# EAGLE board SmartGlove_Schematic (EAGLE 9.2.0)
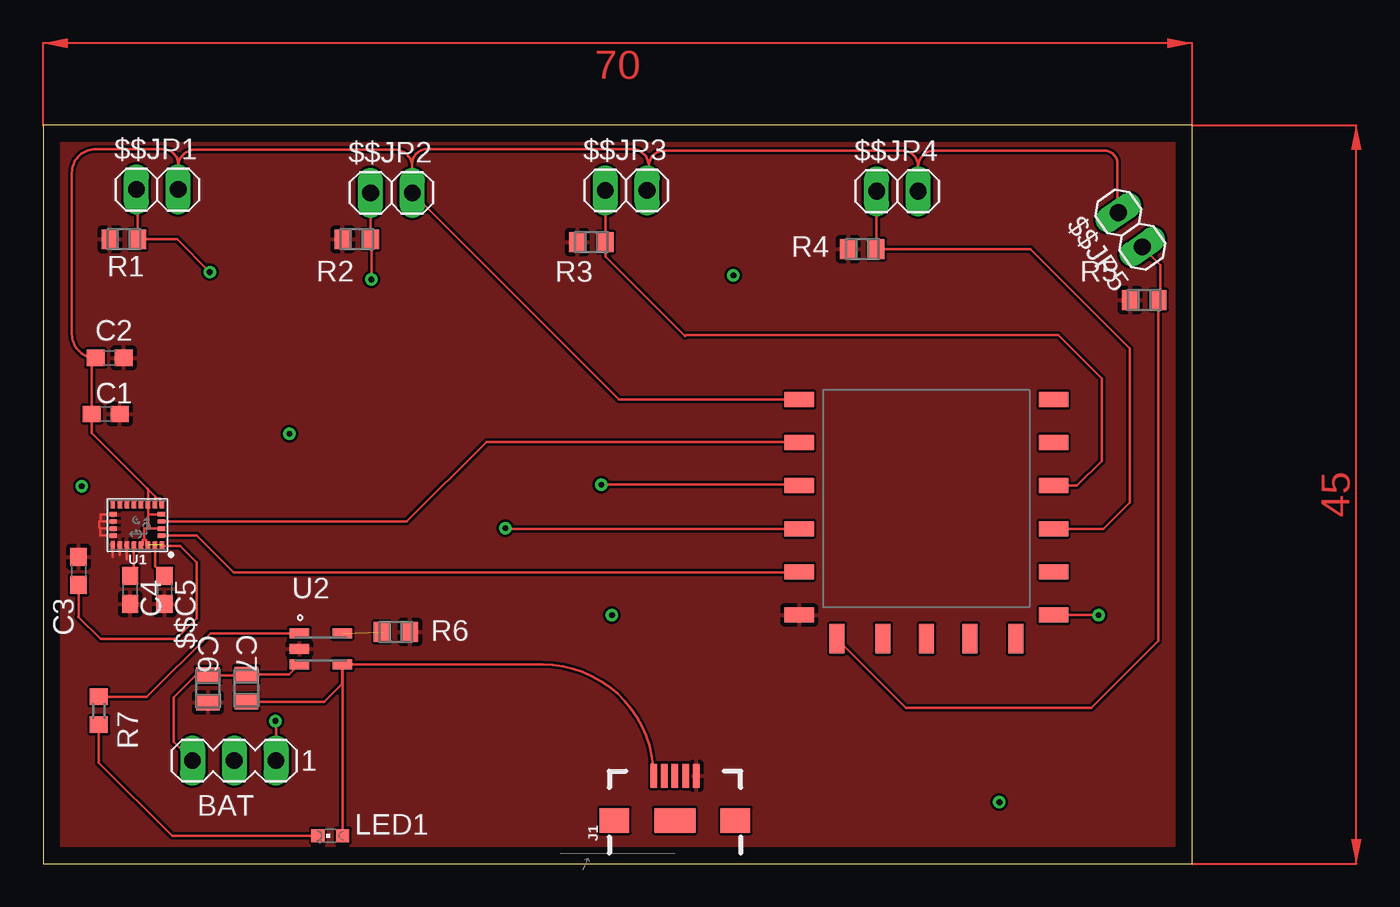
[diagram p0: board, top side]
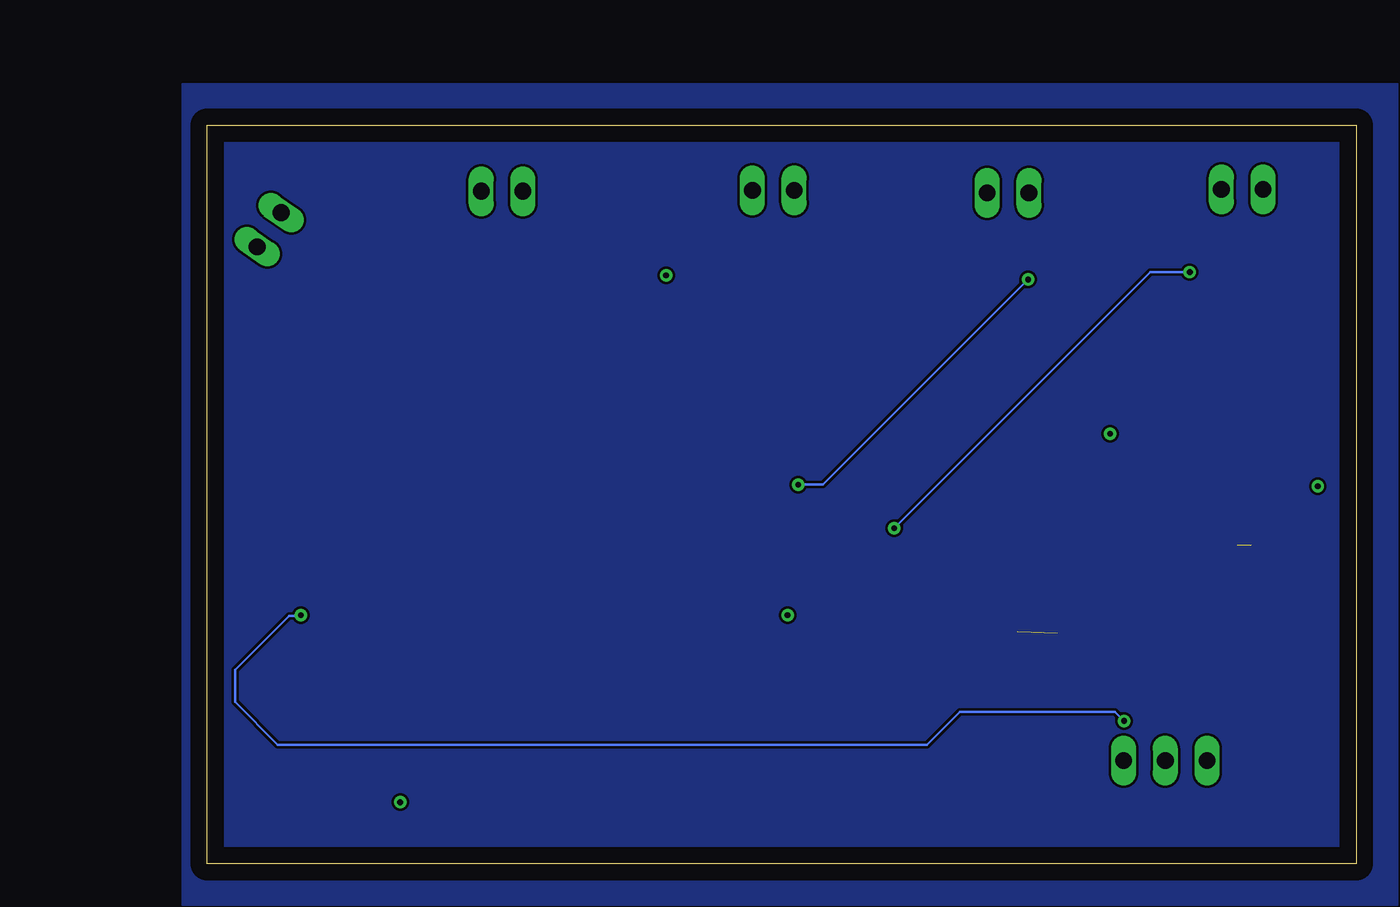
[diagram p1: board, bottom side, seen from below]

Size 70 x 45 mm. Coordinates in mm from the lower left corner, seen from the top.
Outline: 0,0 70,0 70,45 0,45 0,0
Copper layers (1*16): Top 0.035mm / dielectric 1.5mm / Bottom 0.035mm
Design rules "default": minimum track width 6mil, minimum drill 0.35mm, track to track 6mil, track to pad 6mil, pad to pad 6mil, via to via 6mil, smd to smd 6mil, copper to edge 40mil, drill to drill 6mil, minimum pad ring 10mil, minimum via ring 8mil, stop-mask expansion 4mil, vias tented up to drill 0mil, thermal gap 10mil

## Footprints (pad centres in the part's own frame; a part is rotated, then mirrored left to right if it is on the bottom)
C0603 = smd 1.1 x 1: 1 -0.85,0; 2 0.85,0
1X02 = drill 1.016 long: 1 -1.27,0; 2 1.27,0
MA03-1 = drill 1.016 long: 1 -2.54,0; 2 0,0; 3 2.54,0
YAG_CC0805 = smd 0.965 x 1.448: 1 -0.826,0; 2 0.826,0
USB-B-MICRO-SMD = smd 1.45 x 0.4: D+ 2.725,0; D- 2.725,0.65; GND 2.725,-1.3; ID 2.725,-0.65; VBUS 2.725,1.3 | smd 1.5 x 1.8: SHIELD1 0,3.685; SHIELD2 0,-3.685 | smd 1.5 x 2.5: SHIELD3 0,0
CHIPLED_0603 = smd 0.8 x 0.8: A 0,-0.75; C 0,0.75
RC0805N = smd 1.006 x 1.2: 1 -0.853,0; 2 0.853,0
R0603 = smd 1 x 1.1: 1 -0.85,0; 2 0.85,0
LGA-24-3.5X3 = smd 0.27 x 0.45: 1 -1.505,1.225; 6 -1.505,-1.225; 7 -1.075,-1.225; 8 -0.645,-1.225; 9 -0.215,-1.225; 10 0.215,-1.225; 11 0.645,-1.225; 12 1.075,-1.225; 13 1.505,-1.225; 18 1.505,1.225; 19 1.075,1.225; 20 0.645,1.225; 21 0.215,1.225; 22 -0.215,1.225; 23 -0.645,1.225; 24 -1.075,1.225 | smd 0.45 x 0.27: 2 -1.475,0.645; 3 -1.475,0.215; 4 -1.475,-0.215; 5 -1.475,-0.645; 14 1.475,-0.645; 15 1.475,-0.215; 16 1.475,0.215; 17 1.475,0.645
SOT23-5 = smd 1.2 x 0.6: 1 -1.306,0.95; 2 -1.306,0; 3 -1.306,-0.95; 4 1.306,-0.95; 5 1.306,0.95
BLE-NANO-PKG = smd 1.778 x 0.914: A3 7.75,4.375; A4 7.75,1.75; GND$6 -7.75,-3.5; GND$8 7.75,-0.875; RXD -7.75,1.75; SCL -7.75,-0.875; SDA -7.75,7; SWCLK 7.75,9.625; SWDIO 7.75,7; TXD -7.75,4.375; VDD -7.75,9.625; VIN 7.75,-3.5 | smd 0.914 x 1.778: P06 2.65,-4.95; P07 5.45,-4.95; P15 0,-4.95; P28 -5.45,-4.95; P29 -2.65,-4.95

## Placement (x,y rotation side)
$$C5  0.1u  [C0603]  7.4,16.69 270 top
$$JP1  [1X02]  6.95,41.08 0 top
$$JP2  [1X02]  21.22,40.88 0 top
$$JP3  [1X02]  35.52,41.03 0 top
$$JP4  [1X02]  52.04,40.98 0 top
$$JP5  [1X02]  66.24,38.64 125 top
BAT  [MA03-1]  11.64,6.28 180 top
C1  10u  [C0603]  3.82,27.4 0 top
C2  .1u  [C0603]  4.05,30.82 0 top
C3  .1u  [C0603]  2.16,17.84 90 top
C4  10n  [C0603]  5.3,16.68 270 top
C6  CC0805ZRY5V6BB475  [YAG_CC0805]  10.04,10.66 270 top
C7  CC0805ZRY5V6BB475  [YAG_CC0805]  12.38,10.7 270 top
J1  [USB-B-MICRO-SMD]  38.49,2.64 90 top
LED1  [CHIPLED_0603]  17.49,1.71 90 top
R1  ERJ-6GEYJ203V  [RC0805N]  4.91,38.05 0 top
R2  ERJ-6GEYJ203V  [RC0805N]  19.1,38.05 0 top
R3  ERJ-6GEYJ203V  [RC0805N]  33.4,37.88 0 top
R4  ERJ-6GEYJ203V  [RC0805N]  49.9,37.45 0 top
R5  ERJ-6GEYJ203V  [RC0805N]  67.08,34.34 0 top
R6  ERJ-6GEYJ203V  [RC0805N]  21.49,14.13 180 top
R7  [R0603]  3.39,9.32 270 top
U1  LSM9DS1  [LGA-24-3.5X3]  5.74,20.64 180 top
U2  MCP73832T-2ACI/OT  [SOT23-5]  16.92,13.09 0 top
U$1  BLE-NANO  [BLE-NANO-PKG]  53.81,18.66 0 top

## Library data of the parts
$$C5 C1-C4 = rcl; SPICEPREFIX: C
$$JP1-$$JP5 = pinhead
BAT = con-lstb; OC_FARNELL: unknown; OC_NEWARK: unknown
C6 C7 = Yageo 4.7uF Cap; MANUFACTURER_PART_NUMBER: CC0805ZRY5V6BB475; VENDOR: Yageo
J1 = SparkFun-Connectors; PROD_ID: CONN-11752
LED1 = led
R1-R6 = Panasonic 20K Res; MANUFACTURER_PART_NUMBER: ERJ6GEYJ203V; VENDOR: Panasonic
R7 = rcl; SPICEPREFIX: R
U1 = SparkFun-Sensors; PROD_ID: IC-12536
U2 = MCP73832T-2ACI_OT; AVAILABILITY: Unavailable; MF: Microchip; MP: MCP73832T-2ACI-OT; PACKAGE: SOT-23-5 Microchip; PRICE: None
U$1 = BLE-NANO

## Nets
AN1: $$JP5.1 R5.2 U$1.P28
AN2: $$JP2.1 R2.2 U$1.TXD
AN3: $$JP1.1 R1.2 U$1.RXD
AN4: $$JP4.1 R4.2 U$1.A4
AN5: $$JP3.1 R3.2 U$1.A3
GND: $$C5.2 C1.2 C2.2 C3.2 C4.2 C6.2 J1.GND R1.1 R2.1 R3.1 R4.1 R5.1 R6.1 U1.14 U1.15 U1.16 U1.17 U1.18 U1.19 U1.20 U2.2 U$1.GND$6
N$3: U1.4 U$1.SDA
N$4: U1.2 U$1.SCL
N$5: $$C5.1 U1.24
N$6: C4.1 U1.21
N$8: LED1.C R7.2
N$9: R7.1 U2.1
N$16: R6.2 U2.5
VBAT: BAT.3 C6.1 C7.1 U2.3
VBUS: C7.2 J1.VBUS LED1.A U2.4
VDD: $$JP1.2 $$JP2.2 $$JP3.2 $$JP4.2 $$JP5.2 C1.1 C2.1 C3.1 U1.1 U1.3 U1.5 U1.6 U1.7 U1.8 U1.22 U1.23 U$1.VDD
VIN: BAT.1 U$1.VIN

## Tracks (layer width: path | path; a pad name or v marks a point on that pad's centre or on a via)
AN1
  Top 0.152: $$JP5.1 68.07,36.49 68.07,34.48 R5.2 67.93,13.58 63.85,9.5 52.57,9.5 U$1.P28
AN2  (via drill 0.35)
  Top 0.152: $$JP2.1 R2.2 20,38 v20,35.6 | v34,23.1 45.99,23.1 U$1.TXD
  Bottom 0.152: v20,35.6 32.5,23.1 v34,23.1
AN3  (via drill 0.35)
  Top 0.152: $$JP1.1 5.76,41 R1.2 8.15,38.05 v10.15,36.05 | v28.15,20.45 28.19,20.41 U$1.RXD
  Bottom 0.152: v10.15,36.05 12.55,36.05 v28.15,20.45
AN4
  Top 0.152: $$JP4.1 50.77,37.47 R4.2 60.15,37.45 66.2,31.4 66.2,22 64.6,20.4 64.59,20.41 U$1.A4
AN5
  Top 0.152: U$1.A3 62.98,23.03 64.5,24.55 64.5,29.55 61.85,32.2 40.7,32.2 40.43,32.2 39.15,32.2 39.1,32.15 34.25,37 R3.2 $$JP3.1
GND
  Top 0.152: U1.19 4.67,18.81 | U1.20 5.09,18.55 | U1.18 4.24,18.69 | U1.17 3.48,19.99 3.48,20.42 | U1.16 3.48,20.42 | 3.48,20.42 3.4,20.5 3.4,20.85 3.5,20.85 | U1.15 3.5,20.85 | U1.14 3.5,21.28 3.5,20.85
  pour Top: -4.5,47 73.5,47 73.5,-2.5 -4.5,-2.5
  pour Bottom: -2.5,47.5 71.5,47.5 71.5,-2.5 -2.5,-2.5
N$1  (via drill 0.35)
  other vias: 34.65,15.15
N$2  (via drill 0.35)
  other vias: 15,26.2
N$3
  Top 0.152: U1.4 22.16,20.85 27,25.7 46.02,25.7 U$1.SDA
N$4
  Top 0.152: U1.2 9.36,19.99 11.6,17.75 46.02,17.75 U$1.SCL
N$5
  Top 0.152: U1.24 6.82,18.12 $$C5.1
N$6
  Top 0.152: U1.21 5.53,17.76 C4.1
N$7  (via drill 0.35)
  other vias: 42.05,35.85
N$8
  Top 0.152: R7.2 3.39,6.16 7.85,1.7 LED1.C
N$9
  Top 0.152: R7.1 6.32,10.17 10.19,14.04 U2.1
N$10  (via drill 0.35)
  other vias: 58.25,3.75
N$11  (via drill 0.35)
  other vias: 2.35,23
N$16  (1 unrouted)
VBAT
  Top 0.152: U2.3 15,11.53 C7.1 12.34,11.49 C6.1 9.29,11.49 7.95,10.15 7.95,7.43 BAT.3
VBUS
  Top 0.152: 18.23,12.05 U2.4 30.41,12.14 arc-90 J1.VBUS | 18.23,12.05 18.23,10.97 17.13,9.87 C7.2 | LED1.A 18.24,12.04 18.23,12.05
VDD  (1 unrouted)
  Top 0.152: $$JP4.2 arc90 $$JP4.2 arc-90 $$JP4.2 | U1.22 6.07,19.41 6.07,19.74 6.15,19.74 | 6.15,19.74 6.27,19.74 6.27,19.41 U1.23 | U1.3 6.35,20.42 | 6.35,20.42 6.15,20.42 6.15,19.74 | U1.5 6.38,21.28 | 6.38,21.28 U1.8 6.38,22.81 | U1.6 7.13,21.87 7.13,22.24 6.96,22.24 6.82,22.38 | U1.1 7.31,19.35 8.35,19.35 9.35,18.35 9.35,14.95 8.1,13.7 3.5,13.7 2.15,15.05 2.16,15.06 C3.1 | 6.38,21.28 6.38,20.46 6.35,20.42 | 9.1,43.5 9.25,43.5 | 9.25,43.5 21.45,43.5 arc-90 22.49,42.46 | $$JP3.2 arc90 36.9,41.14 36.9,42.5 | 36.9,42.5 arc90 35.85,43.55 23.4,43.55 arc90 22.49,42.64 22.49,42.46 | 53.3,42.45 53.3,42.5 arc90 52.35,43.45 37.85,43.45 arc90 36.9,42.5 | $$JP5.2 arc-90 65.45,39.73 65.45,42.65 arc90 64.65,43.45 54.3,43.45 arc90 53.3,42.45 | 53.3,42.45 $$JP4.2 | 22.49,42.46 $$JP2.2 35.08,28.28 U$1.VDD | 9.25,43.5 arc90 8.22,42.47 | 8.22,42.47 $$JP1.2 | 8.22,42.47 8.22,42.63 arc90 7.3,43.55 3.2,43.55 arc90 1.75,42.1 1.75,32.27 arc90 C2.1 arc90 2.97,30.59 C1.1 2.97,26.23 6.35,22.85 6.38,22.81 | U1.7 6.82,22.38 | 6.82,22.38 6.38,22.81
VIN  (via drill 0.35)
  Top 0.152: U$1.VIN arc90 U$1.VIN v64.3,15.15 | v14.15,8.7 14.18,8.67 BAT.1
  Bottom 0.152: v64.3,15.15 64.35,15.1 65,15.1 68.3,11.8 68.3,9.85 65.7,7.25 26.15,7.25 24.15,9.25 14.7,9.25 v14.15,8.7
(copper drawn outside any net)
  shapes: Top area x2